# Altium PCB IP2315.PcbDoc
Units mil, origin at the board's own origin, x right, y up, seen from the top; angles counter-clockwise.
Board outline 1460 x 830 mil, 2 copper layers (Top Layer, Bottom Layer); 25 components, 21 nets, 101 pads, 45 vias.
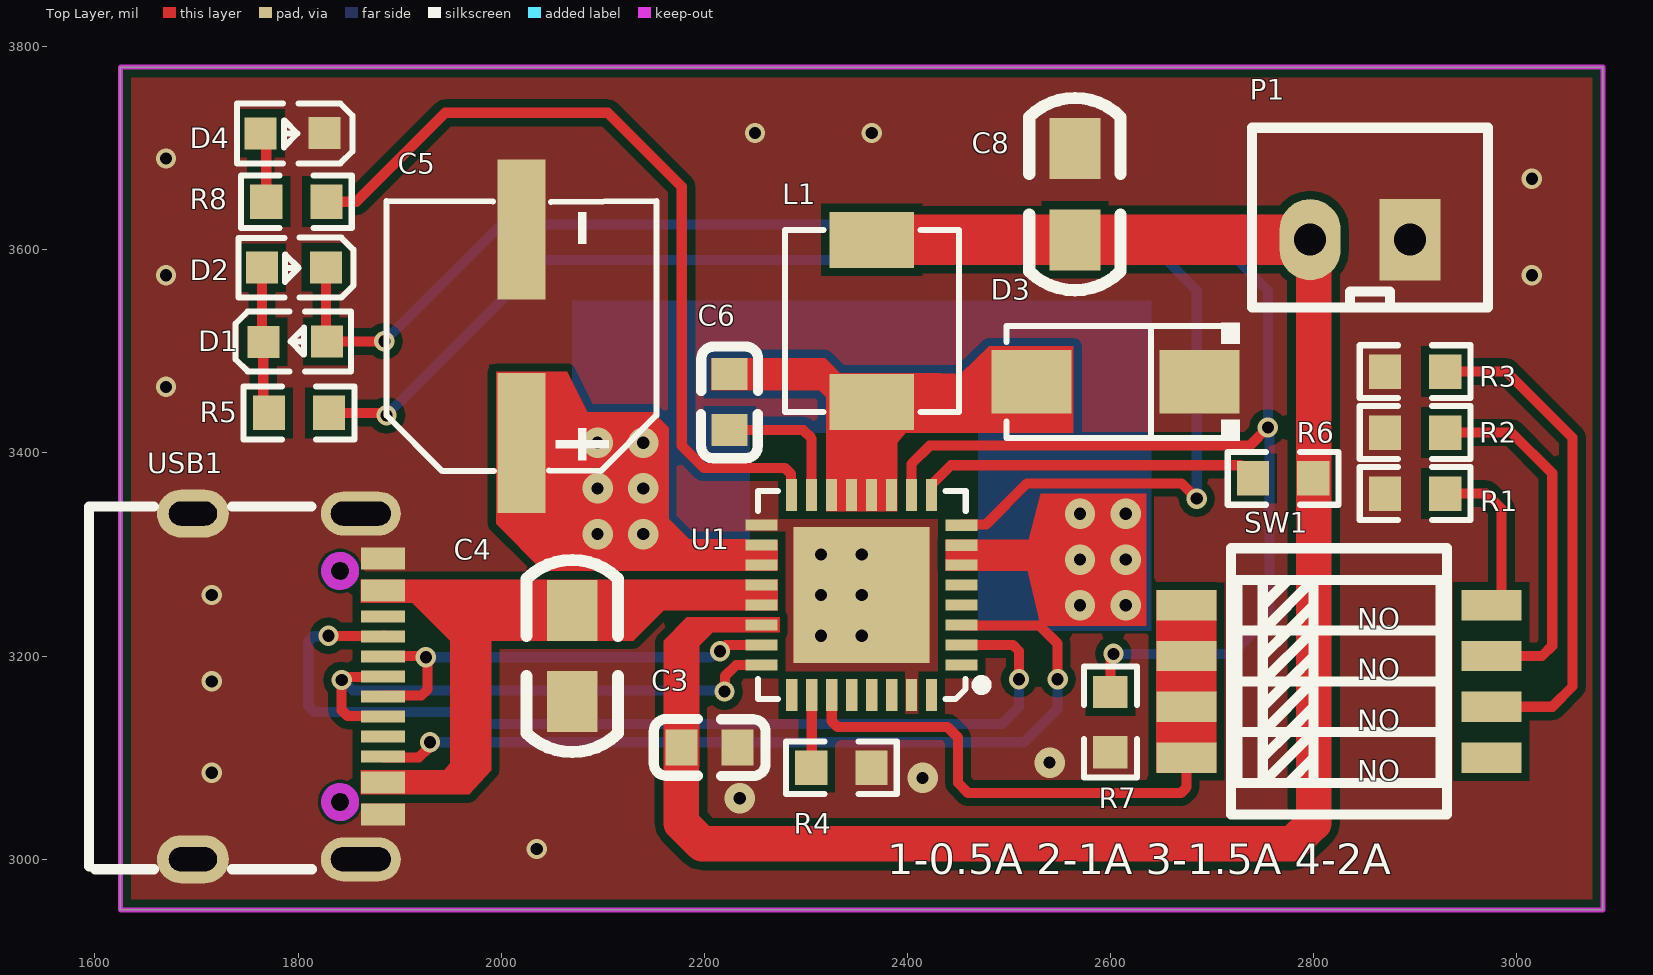
[diagram p0: Top Layer view]
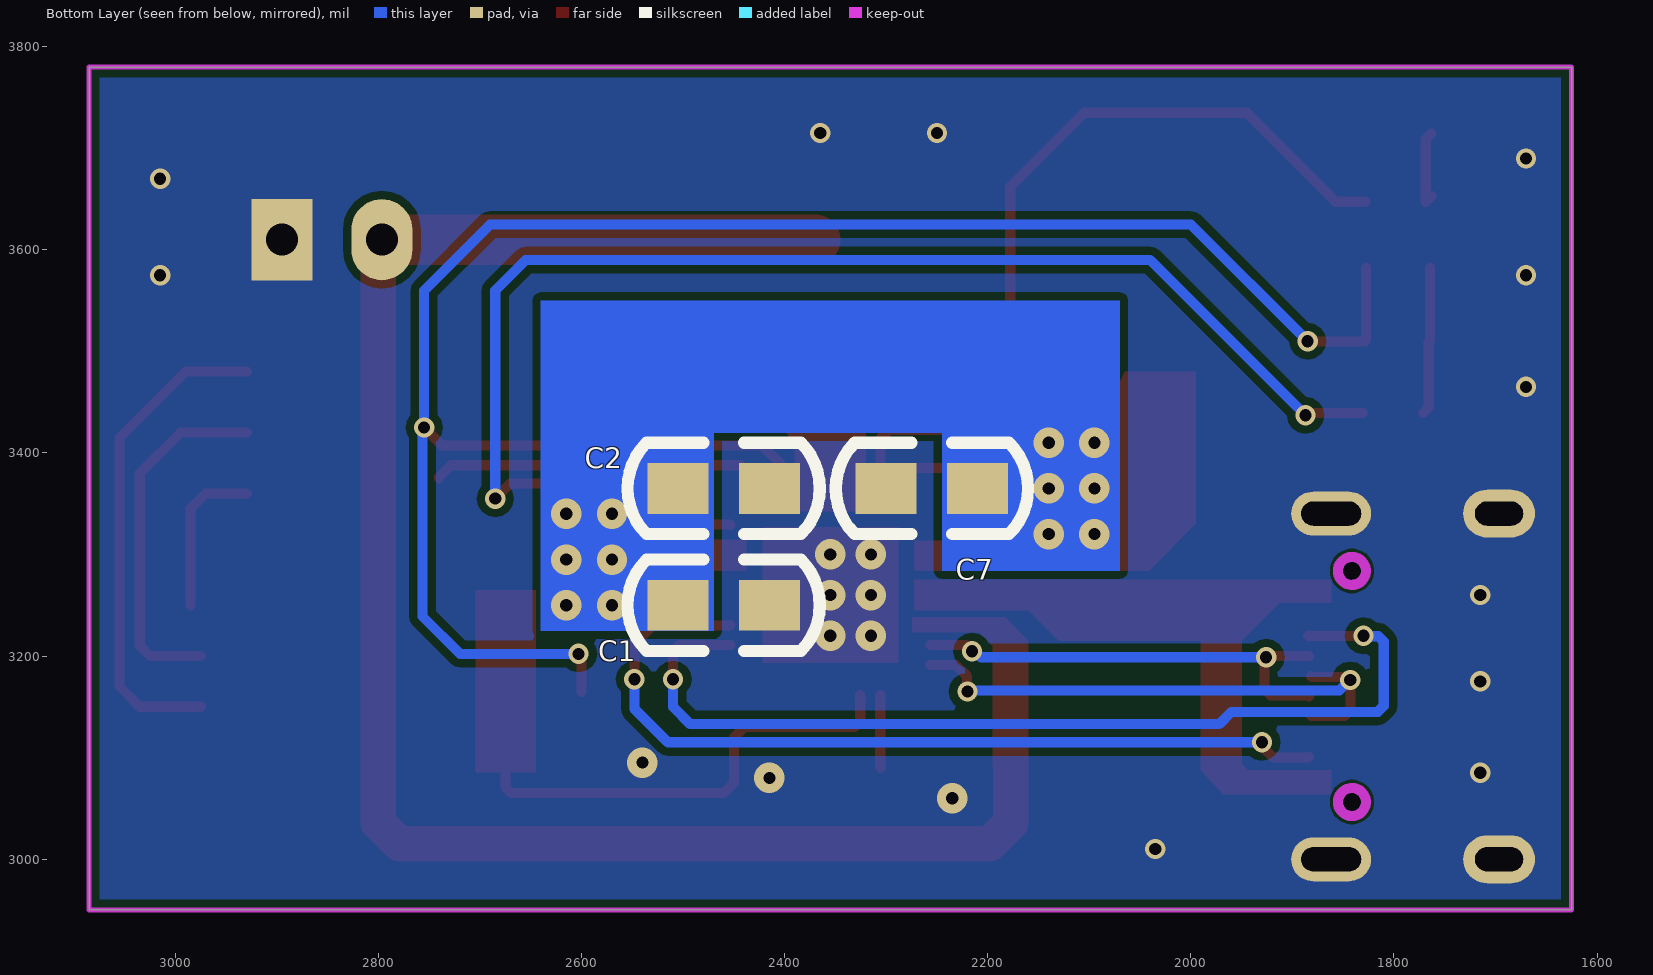
[diagram p1: Bottom Layer view, seen from below]

## Layer stack, top to bottom
Top Solder: solder mask 0.4, Solder Resist, Dk 3.5
Top Layer: signal copper 1.4
Dielectric 1: dielectric 12.6, FR-4, Dk 4.8
Bottom Layer: signal copper 1.4
Bottom Solder: solder mask 0.4, Solder Resist, Dk 3.5

## Board outline
1625,2950 1625,3780 3085,3780 3085,2950

## Design rules (kind name [scope] priority, off if disabled: settings)
Clearance [All] p1: gap=7.87 ignorepadtopadclearanceinfootprint=FALSE except(0: Arc-Hole Track-Hole SMDPad-Hole THPad-Hole Via-Hole Fill-Hole Poly-Hole Region-Hole Text-Hole)
PolygonConnect [All] p1: connectstyle=Direct reliefconductorwidth=10 reliefentries=4 polygonreliefangle="90 Angle" airgapwidth=10
RoomDefinition IP2315 [InComponentClass('IP2315')] p1: confinementstyle=ConfineIn formatcopy=TRUE lockcomponents=FALSE outline 0,0 2000,0 2000,1000 0,1000
RoutingVias [All] p1: holewidth=28 width=50 viastyle="Through Hole" minholewidth=28 minwidth=50 maxholewidth=28 maxwidth=50
SolderMaskExpansion [All] p1: expansion=4 istentingtop=FALSE
Width [All] p1: maxlimit=70 minlimit=10 preferedwidth=10
30 further rules are at their usual default settings.

## Components (designator, comment, footprint, x,y, rotation, side; value= is the part's Value field where it differs from the comment)
C1 "Cap" 0805C 2505.16,3250 r180 bottom value=22uF
C2 "Cap" 0805C 2505.16,3365 r180 bottom value=22uF
C3 "Cap" C0603 2205,3110 r180 top value=100nF
C4 "Cap" 0805C 2070,3154.84 r90 top value=10uF
C5 "Cap" CAP-SMD_BD6.3-L6.6-W6.6-LS7.4-FD 2020,3515 r90 top value=220uF
C6 "Cap" C0603 2225,3450 r90 top value=100nF
C7 "Cap" 0805C 2300.16,3365 r180 bottom value=22uF
C8 "Cap" 0805C 2565,3609.68 r90 top value=10uF
D1 "Green" LED0603-RD_RED 1797.22,3509.59 r0 top
D2 "Green" LED0603-RD_RED 1795.87,3582.58 r180 top
D3 "SS34" SMA_L4.3-W2.5-LS5.0-RD 2605,3470 r180 top
D4 "Green" LED0603-RD_RED 1794.71,3714.74 r180 top
L1 "2.2uH" IND-SMD_L4.4-W4.2 2365,3530 r90 top
P1 "VREF_SEL" XH-2P-2.5 2895,3610 r180 top
R1 "51k" R0603 2900,3360 r180 top
R2 "130k" R0603 2900,3420 r180 top
R3 "180k" R0603 2900,3480 r180 top
R4 "51k" R0603 2335,3090 r0 top
R5 "100R" R0603 1800.91,3439.35 r0 top
R6 "10k" R0603 2770,3375 r180 top
R7 "120K" R0603 2600,3135 r90 top
R8 "100R" R0603 1798.35,3647.35 r0 top
SW1 "DSHP04TS-S" SW-SMD_8P-L6.7-W5.4-P1.27-LS8.5 2825,3175 r270 top
U1 "IP2315" QFN-32_L5.0-W5.0-P0.50-BL-EP3.4 2355,3260 r90 top
USB1 "TYPE-C 16PIN 2MD(073)" TYPE-C-16PIN-2MD-073 1790,3170 r270 top

## Footprints (in the part's own frame and the unit in brackets; to place one, negate y for a bottom-side part, rotate by r counter-clockwise, add the part's x,y. Pads: shape width x height; smd on the part's side, far side on the other; paste and mask are expansions set on the pad)
0805C [mil]
  rect 60x50 smd: 1(0.16,0) 2(90.16,0)
  silkscreen extent -49,-45 140,45
C0603 [mm]
  rect 0.8x0.9 smd: 1(-0.7,0) 2(0.7,0)
  silkscreen extent -1.41,-0.71 1.39,0.72
CAP-SMD_BD6.3-L6.6-W6.6-LS7.4-FD [mm]
  rect 3.5x1.2 smd: 1(-2.67,0) 2(2.67,0)
  silkscreen extent -3.38,-3.38 3.38,3.38
IND-SMD_L4.4-W4.2 [mm]
  rect 1.4x2.12 smd: 1(2.028,0) 2(-2.028,0)
  silkscreen extent -2.28,-2.18 2.28,2.18
LED0603-RD_RED [mm]
  rect 0.8x0.8 smd: 1(-0.8,-0.003) 2(0.8,0.003)
  silkscreen extent -1.49,-0.75 1.39,0.76
QFN-32_L5.0-W5.0-P0.50-BL-EP3.4 [mm]
  rect 0.28x0.8 smd paste-100 mask+0.05: 1(-1.75,-2.5) 2(-1.251,-2.5) 3(-0.751,-2.5) 4(-0.251,-2.5) 5(0.249,-2.5) 6(0.749,-2.5) 7(1.249,-2.5) 8(1.749,-2.5) 17(1.752,2.5) 18(1.251,2.5) 19(0.752,2.5) 20(0.251,2.5) 21(-0.248,2.5) 22(-0.749,2.5) 23(-1.248,2.5) 24(-1.749,2.5)
  rect 0.8x0.28 smd paste-100 mask+0.05: 9(2.5,-1.748) 10(2.5,-1.248) 11(2.5,-0.748) 12(2.5,-0.248) 13(2.5,0.252) 14(2.5,0.752) 15(2.5,1.252) 16(2.5,1.752) 25(-2.5,1.75) 26(-2.5,1.25) 27(-2.5,0.75) 28(-2.5,0.25) 29(-2.5,-0.25) 30(-2.5,-0.75) 31(-2.5,-1.25) 32(-2.5,-1.75)
  rect 3.4x3.4 smd paste-100 mask+0.05: 33(0,0)
  silkscreen extent -2.6,-3.12 2.6,2.6
R0603 [mil]
  rect 31.75x34.02 smd paste-3937.01 mask+2: 1(-29.66,0) 2(29.66,0)
  silkscreen extent -55,-26 55,26
SMA_L4.3-W2.5-LS5.0-RD [mm]
  rect 2x1.593 smd: 1(-2.1,0) 2(2.1,0)
  silkscreen extent -3.11,-1.48 2.73,1.48
SW-SMD_8P-L6.7-W5.4-P1.27-LS8.5 [mil]
  rect 30x59.05 smd: 1(-75,-150) 2(-25,-150) 3(25,-150) 4(75,-150) 5(75,150) 6(25,150) 7(-25,150) 8(-75,150)
  silkscreen extent -131,-106 131,106
TYPE-C-16PIN-2MD-073 [mm]
  rect 0.55x1.1 smd paste-100 mask+0.05: 1(-3.2,2.375) 2(-2.4,2.375) 11(2.4,2.375) 12(3.2,2.375)
  rect 0.3x1.1 smd paste-100 mask+0.05: 3(-1.75,2.375) 4(-1.25,2.375) 5(-0.75,2.375) 6(-0.25,2.375) 7(0.25,2.375) 8(0.75,2.375) 9(1.25,2.375) 10(1.75,2.375)
  oval 1.1x2 hole 0.6 slot 1.5 at 90 deg paste+0 mask+0.05: 13(-4.325,1.825) 14(4.325,1.825)
  oval 1.2x1.8 hole 0.6 slot 1.2 at 90 deg paste+0 mask+0.05: 13(-4.325,-2.375) 14(4.325,-2.375)
  Keep-Out Layer board cut-out: -2.54,1.305 -2.589,1.477 -2.717,1.603 -2.89,1.649 -3.063,1.603 -3.191,1.477 -3.24,1.305 -3.24,1.305 -3.191,1.133 -3.063,1.007 -2.89,0.961 -2.717,1.007 -2.589,1.133 -2.54,1.305
  Keep-Out Layer board cut-out: 3.24,1.305 3.191,1.477 3.063,1.603 2.89,1.649 2.717,1.603 2.589,1.477 2.54,1.305 2.54,1.305 2.589,1.133 2.717,1.007 2.89,0.961 3.063,1.007 3.191,1.133 3.24,1.305
  Multi-Layer keep-out circle w0.254: c-2.89,1.305 r0.35
  Multi-Layer keep-out circle w0.254: c2.89,1.305 r0.35
  silkscreen extent -4.5,-4.97 4.57,0.6
XH-2P-2.5 [mil]
  rect 60x80 hole 31.5: 1(0,0)
  oval 60x80 hole 31.5: 2(98.43,0)
  silkscreen extent -77,-110 156,67

## Part data
C1 C2 C3 C4 C5 C6 C7 C8: library part Cap_3, "Capacitor", LatestRevisionDate=17-Jul-2002, LatestRevisionNote="Re-released for DXP Platform.", PackageDescription="Radial Cap, Thru-Hole; 2 Leads; 0.3 in Pin Spacing", PackageReference=RAD-0.3, Published=8-Jun-2000, Publisher="Altium Limited"
D1 D2 D4: library part LED
D3: "肖特基二极管", BOM名称=肖特基二极管, 封装库来自淘宝 ID：黄晶宝石=https://shop463601444.taobao.com, 属性=40V/3A
L1: library part INDUCTLR2_1, "C167206"
P1: library part "Header 2", "Header, 2-Pin", LatestRevisionDate=17-Jul-2002, LatestRevisionNote="Re-released for DXP Platform.", Publisher="Altium Limited"
R1 R4 R5 R6 R7 R8: library part Res2, "500mA", LatestRevisionDate=17-Jul-2002, LatestRevisionNote="Re-released for DXP Platform.", PackageDescription="Axial Device, Thru-Hole; 2 Leads; 0.4 in Pin Spacing", PackageReference=AXIAL-0.4, Published=8-Jun-2000, Publisher="Altium Limited"
R2 R3: library part Res2, "Resistor", LatestRevisionDate=17-Jul-2002, LatestRevisionNote="Re-released for DXP Platform.", PackageDescription="Axial Device, Thru-Hole; 2 Leads; 0.4 in Pin Spacing", PackageReference=AXIAL-0.4, Published=8-Jun-2000, Publisher="Altium Limited"
SW1: Color=黑色, Current Rating=25mA, JLCPCB Part Class="Extended Part", LCSC Part Name="间距1.27mm 平拨,凹槽式 4位拨码开关", Manufacturer="XKB Connectivity(中国星坤)", Operating Life=3千次, Operating Temperature=-20℃~+70℃, Voltage Rating=24V, Add into BOM=yes, Circuit=单刀单掷, Convert to PCB=yes, Datasheet=https://atta.szlcsc.com/upload/public/pdf/source/20211009/11BE85C99D2C85B0991AF4F9D6EB8BDE.pdf, Device=DSHP04TS-S, Lead Pitch=1.27mm, Manufacturer Part=DSHP04TS-S, Name=DSHP04TS-S, Number of Positions=4位, Pin Style=鸥翼型, Supplier=LCSC, Supplier Footprint=SMD-8P,5.4x6.7mm, Supplier Part=C319050, Symbol=DSHP04TS-S, Type=平拨,凹槽式
U1: JLCPCB Part Class="Extended Part", Manufacturer=INJOINIC(英集芯), Add into BOM=yes, Convert to PCB=yes, Device=IP2315, LCSC Part Name=IP2315, Manufacturer Part=IP2315, Name=IP2315, Supplier=LCSC, Supplier Footprint=QFN-32-EP(5x5), Supplier Part=C2764357, Symbol=IP2315
USB1: Current Rating - Power (Max)=5A, JLCPCB Part Class="Extended Part", LCSC Part Name="Type-C 母 卧贴", Manufacturer="SHOU HAN(首韩)", Operating Temperature Range=-25℃~+85℃, Add into BOM=yes, Connector Type=Type-C, Convert to PCB=yes, Datasheet=https://atta.szlcsc.com/upload/public/pdf/source/20211123/39B17C16241EAC15C5E277BDA434118E.pdf, Device="TYPE-C 16PIN 2MD(073)", Gender=母, Manufacturer Part="TYPE-C 16PIN 2MD(073)", Mounting Style=卧贴, Name="TYPE-C 16PIN 2MD(073)", Number of Contacts=16P, Number of Ports=1, Standard=-, Supplier=LCSC, Supplier Footprint=SMD, Supplier Part=C2765186, Symbol="TYPE-C 16PIN 2MD(073)"

## Via types
v1: diameter 20, hole 12, Top Layer to Bottom Layer, tented both sides, 24 vias
v2: diameter 30, hole 12, Top Layer to Bottom Layer, tented both sides, 15 vias
v3: diameter 30, hole 12, Top Layer to Bottom Layer, 6 vias

## Nets (pads, with @x,y where several pads share a name; then routed paths per layer and width w, separated by ;. In a path a pad name is that pad's centre, name@x,y a point inside that pad or via, vN(x,y) a via of type N, cw(c..) or ccw(c..) an arc to the next point about the centre after c; other vN are vias at no path point)
BAT+: C3.2 C8.1 L1.1 P1.2 R6.1 U1.22 | length 1718.6
  Top Layer w35: C3.2@2177.31,3109.78 2177.31,3035.5 2197.82,3015 2779.5,3015 2800,3035.5 2800,3375 2800,3405 P1.2@2800,3610
  Top Layer w50: L1.1@2370,3609.84 C8.1 2565,3610 P1.2@2800,3610
CC1: U1.2 USB1.4 | length 969.3
  Top Layer w10: v1(1830,3220) 1830.4,3219.6 1883.11,3219.6 USB1.4 USB1.4@1884.42,3220.12 ; U1.2 2504.14,3210.73 2510,3204.87 2510,3177.23 v1(2509.89,3177.13)
  Bottom Layer w10: v1(1830,3220) 1829.39,3219.39 1815.25,3219.39 1810,3214.14 1810,3150.86 1815.86,3145 1960,3145 1972.13,3132.87 2492.87,3132.87 2509.89,3149.89 v1(2509.89,3177.13)
CC2: U1.3 USB1.10 | length 853.2
  Top Layer w10: USB1.10 1884.41,3100.19 1919.14,3100.19 1928.09,3109.13 1928.09,3113.09 v1(1930,3115) ; U1.3 2453.84,3230 2530,3230 2547.98,3212.02 v1(2547.98,3177.13)
  Bottom Layer w10: v1(1930,3115) 2515,3115 2547.98,3147.98 v1(2547.98,3177.13)
DN: U1.23 USB1.5 USB1.7 | length 458.4
  Top Layer w10: USB1.7 1884.41,3161.06 1921.55,3161.06 1927.41,3166.92 1927.41,3194.12 1925.46,3196.07 v1@1922.6,3196.07 ; USB1.5 1884.11,3200.13 1924.43,3200.13 v1(1925.82,3198.74) ; v1(2215.5,3204.75) 2221.59,3210.85 U1.23
  Bottom Layer w10: v1(1925.82,3198.74) 2206.78,3198.74 2212.79,3204.75 v1(2215.5,3204.75)
DP: U1.24 USB1.6 USB1.8 | length 548.6
  Top Layer w10: USB1.8@1881.49,3140.77 1848.79,3140.77 1842.93,3146.63 v1(1842.93,3176.3) 1845.86,3179.23 1880.59,3179.23 USB1.6@1881.49,3180.14 ; v1(2220,3165) 2220.28,3165.28 2220.28,3180 2231.44,3191.16 U1.24
  Bottom Layer w10: v1(1842.93,3176.3) 1843.54,3176.3 1853.79,3166.06 2218.94,3166.06 v1(2220,3165)
GND: C1.2 C2.2 C3.1 C4.1 C5.2 C7.1 C8.2 D3.1 D4.1 P1.1 R1.2 R2.2 R3.2 R4.2 R7.1 U1.17 U1.31 U1.33 USB1.1 USB1.12 USB1.13 USB1.14
  other v1: 2035,3010 1715,3085 1715,3175 1715,3260 1670,3465 1670,3575 3015,3575 3015,3670 1670,3690 2250,3715 2365,3715
  other v2: 2235,3060 2415,3080 2540,3095
  other v3: 2315,3220 2355,3220 2315,3260 2355,3260 2315,3300 2355,3300
NetC6_1: C6.1 U1.15 | length 140
  Top Layer w10: C6.1 2297.56,3422.44 2305.71,3414.29 U1.15
NetC6_2: C6.2 D3.2 L1.2 U1.11 U1.12 U1.13 U1.14 | length 23.5
  Top Layer w10: L1.2@2368.35,3466.81 L1.2@2385,3450.16
NetD1_1: D1.2 D2.1 R7.2 U1.10 | length 1999
  Top Layer w10: D2.1 1827.34,3511.08 D1.2 v1@1879.72,3509.72 ; U1.10 2404.13,3389.17 2422.09,3407.13 2737.13,3407.13 v1(2755,3425) ; R7.2 2600,3199.14 v1(2602.93,3202.07) v1@2605.86,3205
  Bottom Layer w10: v1(1885,3510) 2000,3625 2690,3625 2755,3560 v1(2755,3425) 2756.53,3423.47 2756.53,3238.85 2719.75,3202.07 v1(2602.93,3202.07)
NetD1_2: D1.1 D2.2 R5.1 | length 145.9
  Top Layer w10: D2.2 1764.38,3510.81 1765.74,3509.45 1765.74,3444.86 R5.1
NetD4_1: D4.2 R8.1 | length 77.2
  Top Layer w10: R8.1@1763.23,3652.82 R8.1 1768.69,3709.15 D4.2
NetR1_1: R1.1 SW1.8 | length 156.6
  Top Layer w10: R1.1 2970,3360 2985,3345 SW1.8@2985,3250
NetR2_1: R2.1 SW1.7 | length 356.1
  Top Layer w10: R2.1 2995,3420 3035,3380 3035,3210 3025,3200 SW1.7
NetR3_1: R3.1 SW1.6 | length 485.5
  Top Layer w10: R3.1 2990,3480 3055,3415 3055,3170 3035,3150 SW1.6
NetR4_1: R4.1 U1.26 | length 71.8
  Top Layer w10: R4.1 2305.79,3090.45 U1.26
NetR5_2: R5.2 U1.8 | length 1387.7
  Top Layer w10: R5.2 v1@1884.78,3439.35 ; U1.8 2453.93,3329.35 2477.12,3329.35 2517.76,3370 2670,3370 v1(2685,3355)
  Bottom Layer w10: v1(1887.08,3437.05) 2040.04,3590 2655,3590 2685,3560 v1(2685,3355)
NetR6_2: R6.2 U1.9 | length 340.7
  Top Layer w10: U1.9 2424.33,3358.93 2424.33,3369.17 2443.04,3387.87 2728.6,3387.87 2740.34,3376.13 R6.2
NetR8_2: R8.2 U1.16 | length 811.5
  Top Layer w10: R8.2 1857.35,3647.35 1945,3735 2105,3735 2177.87,3662.13 2177.87,3407.13 2200,3385 2279.65,3385 2285.51,3379.14 2285.51,3358.93 U1.16
RICHG: SW1.1 SW1.2 SW1.3 SW1.4 U1.27 | length 462.3
  Top Layer w10: U1.27 2325.47,3135.86 2331.33,3130 2439.64,3130 2450,3119.64 2450,3075 2460,3065 2669.14,3065 2675,3070.86 SW1.4
VBUS: C4.2 U1.20 U1.21 USB1.2 USB1.11
VSYS: C1.1 C2.1 C5.1 C7.2 U1.6 U1.7 U1.18 U1.19 | length 71.2
  Top Layer w10: v2(2140,3320) v2@2145.82,3320
  Bottom Layer w10: 2180,3315 2185,3320 2185,3345 2205,3365 C7.2
  other v2: 2570,3250 2615,3250 2570,3295 2615,3295 2095,3320 2570,3340 2615,3340 2095,3365 2140,3365 2095,3410 2140,3410
pads on no net: SW1.5 U1.1 U1.4 U1.5 U1.25 U1.28 U1.29 U1.30 U1.32 USB1.3 USB1.9

## Polygon pours and split planes (outlines as drawn)
GND on Bottom Layer "GND_L02_P001" (solid, remove dead copper, pour order 1): 1520,3850 1520,2875 3165,2875 3165,3850
GND on Top Layer "GND_L01_P000" (solid, remove dead copper, pour order 0): 1520,3850 1520,2885 3170,2885 3170,3850

## Keep-outs
Keep-Out Layer:
  the board outline again, w5

## Other copper
Top Layer:
  rectangle net RICHG: 2645,3085.43 2704.53,3265
  rectangle net GND: 2288.07,3193.07 2421.93,3326.93
  region net VBUS: 1905.16,3259.84 1955,3210 1970,3210 1970,3265 1905.16,3265
  region net VSYS: 2437.67,3314.67 2519.36,3314.67 2531.11,3360 2635,3360 2635,3230 2531.11,3230 2518.63,3283.96 2437.67,3283.96
  region net BAT+: 2274.1,3237.92 2182.92,3237.92 2160,3215 2160,3090.72 2195,3090.72 2195,3210 2208.25,3223.25 2274.1,3223.25
  region net VBUS: 1861.85,3275 2272.23,3275 2272.35,3245 2160,3245 2130,3215 1990,3215 1990,3087.32 1968.69,3063.69 1861.85,3063.69 1861.85,3087.32 1943.93,3087.32 1950,3094.27 1950,3252.67 1905.16,3252.67 1861.85,3252.67
  region net NetC6_2: 2425.2,3478.14 2452.63,3478.14 2480.65,3505 2563.55,3505 2563.55,3420 2425.2,3420
  region net NetC6_2: 2206.8,3493.33 2318.94,3493.33 2340,3472.27 2340,3450 2325,3450 2313.15,3461.85 2206.8,3461.85
  region net VSYS: 1995,3480 1995,3330 2040.92,3284.08 2271.4,3284.08 2272.32,3285 2272.32,3313.74 2241.87,3313.74 2240.61,3315 2185,3315 2165,3335 2165,3424.98 2149.9,3440 2085,3440 2065,3480
  region net NetC6_2: 2319.88,3342.67 2319.88,3478.2 2432.73,3478.2 2432.73,3420 2398.45,3420 2389.96,3409.95 2389.96,3342.67
Bottom Layer:
  region net VSYS: 2245,3284.08 2245,3420 2470,3420 2470,3225 2640,3225 2640,3550 2070,3550 2070,3284.08

## Silkscreen, mask and mechanical layers (free items; w line width, h text height)
Top Overlay:
  text "1-0.5A 2-1A 3-1.5A 4-2A" at 2380,2985 h30

## Text inside footprints (layer, text, board x,y; h text height)
SW1: Top Overlay "ON" at 2885.54,3197.21 h20 r180; Top Overlay "ON" at 2885.54,3147.21 h20 r180; Top Overlay "ON" at 2885.54,3097.21 h20 r180; Top Overlay "ON" at 2885.54,3247.21 h20 r180